# Allegro board PCB-DIAPAZON880.brd
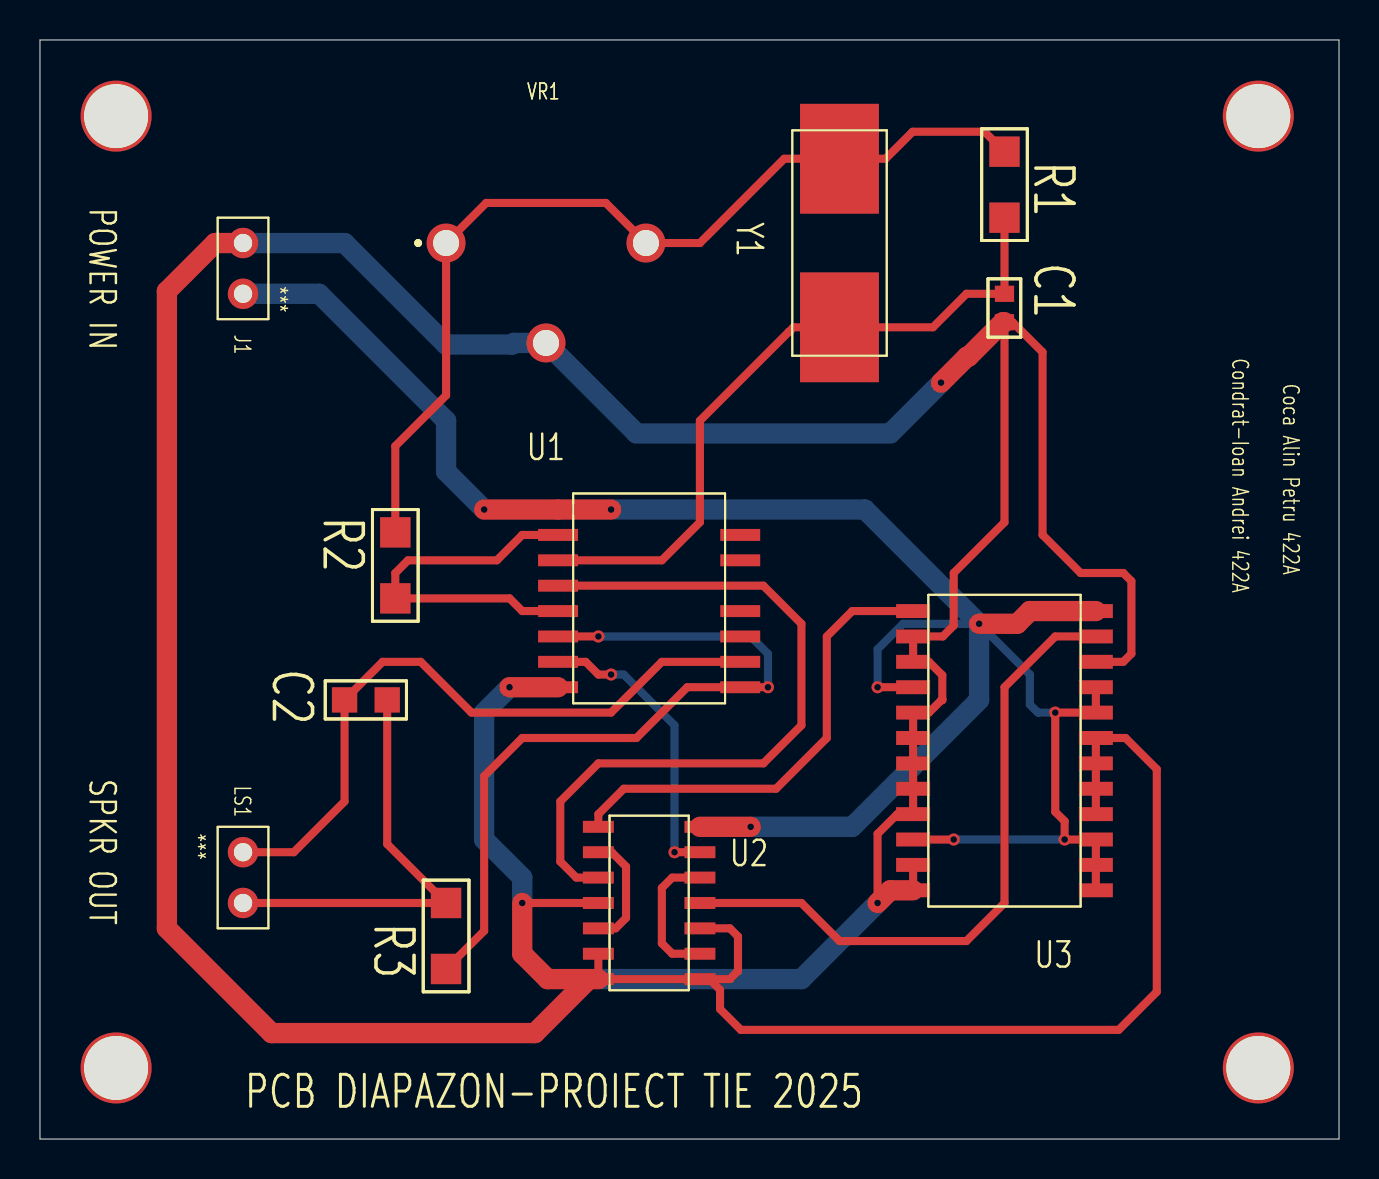
[diagram p0: board, top side]
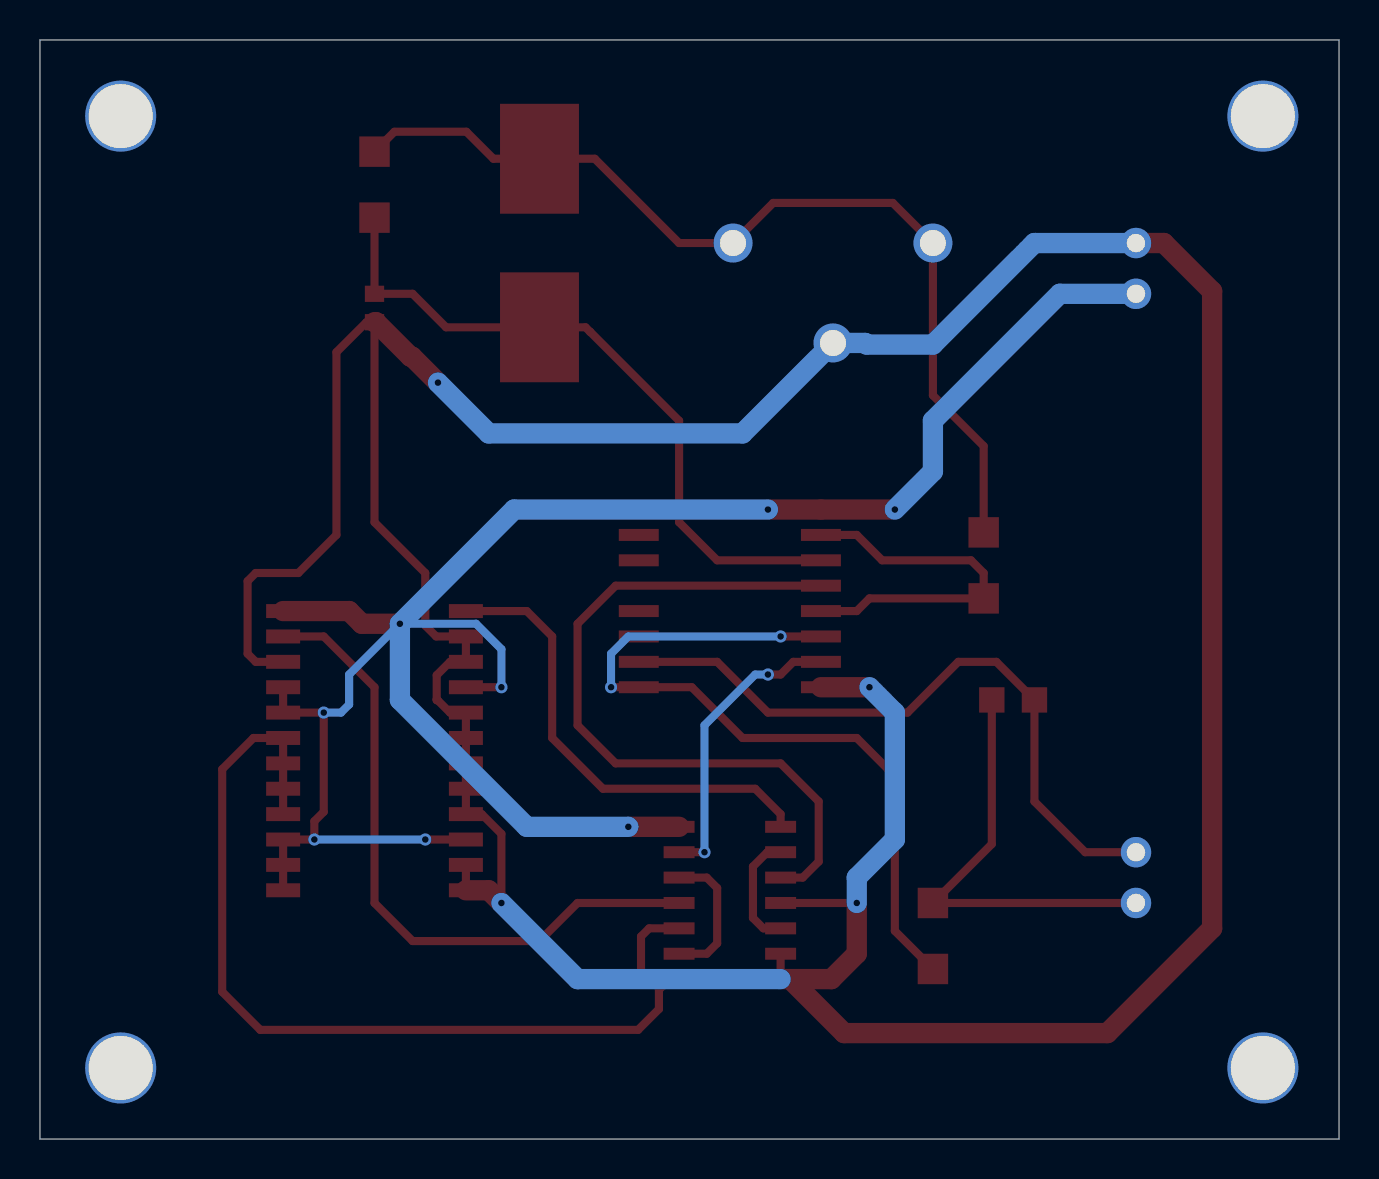
[diagram p1: board, bottom side, seen from below]

Outline 65 x 54.99 mm; copper layers: TOP, BOTTOM. Coordinates in mm from the lower left corner of the outline.
Outline path: 0,54.99 0,0 65,0 65,54.99 0,54.99

## Design rules (mm)
constraint set DEFAULT: min track width 0.127

## Placement (name value [footprint] x y rotation side)
C1  68p  [SMC0603]  48.26 42.29 270 top
C2  0.1  [SMC0805]  15.24 21.97 0 top
J1  CON2  [JUMPER2]  10.16 44.83 270 top
LS1  SPEAKER  [JUMPER2]  10.16 11.81 90 top
NOREF  -  [unnamed]  60.96 3.56 0 top
NOREF#2  -  [unnamed]  60.96 51.18 0 top
NOREF#3  -  [unnamed]  3.81 51.18 0 top
NOREF#4  -  [#2]  65 0 90 top
NOREF#5  -  [unnamed]  3.81 3.56 0 top
NOREF#6  -  [#2]  0 54.99 0 top
NOREF#7  -  [#2]  -35.56 -135.51 0 top
R1  1M  [SMC1206]  48.26 46.1 90 top
R2  1K  [SMC1206]  17.78 27.05 90 top
R3  1K  [SMC1206]  20.32 11.81 270 top
U1  4049  [CD4049]  30.48 27.05 0 top
U2  4013  [PTCD4013]  30.48 11.81 0 top
U3  4059  [CD74HC4059]  48.26 19.43 0 top
VR1  -  [BFC280831659]  20.32 44.83 0 top
Y1  3.2768M  [P2QUARTZ]  40 44.83 270 top

## Library data of the parts
C1 C2 = CAP
J1 = CON2: User Part Number: ***
LS1 = SPEAKER: User Part Number: ***
R1-R3 = RESISTOR
U1 = 4049_4
U2 = 4013_9
U3 = 4059_1
VR1 = BFC280831659
Y1 = CRYSTAL

## Footprints (pads in the part's own frame, mm; a bottom-side part is the same pattern mirrored in y, then rotated)
BFC280831659
  round 0 hole 3.2 unplated: (5,0)
  round 1.95 hole 1.3: 1(0,0) 2(5,-5) 3(10,0)
CD74HC4059
  rect 1.702x0.699 smd: 1(-4.572,6.985) 2(-4.572,5.715) 3(-4.572,4.445) 4(-4.572,3.175) 5(-4.572,1.905) 6(-4.572,0.635) 7(-4.572,-0.635) 8(-4.572,-1.905) 9(-4.572,-3.175) 10(-4.572,-4.445) 11(-4.572,-5.715) 12(-4.572,-6.985) 13(4.572,-6.985) 14(4.572,-5.715) 15(4.572,-4.445) 16(4.572,-3.175) 17(4.572,-1.905) 18(4.572,-0.635) 19(4.572,0.635) 20(4.572,1.905) 21(4.572,3.175) 22(4.572,4.445) 23(4.572,5.715) 24(4.572,6.985)
CD4049
  rect 1.999x0.599 smd: 1(-4.558,4.445) 2(-4.558,3.175) 3(-4.558,1.905) 4(-4.558,0.635) 5(-4.558,-0.635) 6(-4.558,-1.905) 7(-4.558,-3.175) 8(-4.558,-4.445) 9(4.558,-4.445) 10(4.558,-3.175) 11(4.558,-1.905) 12(4.558,-0.635) 14(4.558,1.905) 15(4.558,3.175)
JUMPER2
  round 1.524 hole 0.914: 1(0,0) 2(2.54,0)
P2QUARTZ
  rect 5.499x3.95 smd: 1(-4.216,0) 2(4.216,0)
PTCD4013
  rect 1.549x0.599 smd: 1(-2.54,3.81) 2(-2.54,2.54) 3(-2.54,1.27) 4(-2.54,0) 5(-2.54,-1.27) 6(-2.54,-2.54) 7(-2.54,-3.81) 8(2.54,-3.81) 9(2.54,-2.54) 10(2.54,-1.27) 11(2.54,0) 12(2.54,1.27) 13(2.54,2.54) 14(2.54,3.81)
SMC0603
  rect 0.813x0.965 smd: 1(0,0) 2(1.422,0)
SMC0805
  rect 1.27x1.27 smd: 1(0,0) 2(2.134,0)
SMC1206
  rect 1.524x1.524 smd: 1(0,0) 2(3.302,0)
unnamed
  round 3.556 hole 3.2 unplated: (0,0)

## Nets
+9V: J1.2 U1.1 U2.14 U3.4 U3.10 U3.13 U3.14 U3.15 U3.20 U3.21 U3.24(VCC)
GND: C1.2 J1.1 U1.8 U2.4 U2.6 U2.7 U2.8(S) U2.10 U3.2 U3.3 U3.5 U3.6 U3.7 U3.8 U3.9 U3.11 U3.12 U3.16 U3.17 U3.18 U3.19 U3.22 VR1.2(S)
N00452: C1.1 R1.1 U1.3 Y1.2
N00494: R1.2 R2.2 VR1.1 VR1.3 Y1.1
N00555: R2.1 U1.2 U1.5
N01503: U2.1 U3.1
N02785: R3.2 U1.6 U1.9
N02849: C2.1 LS1.2 U1.10
N02853: C2.2 LS1.1 R3.1
N19077: U2.2 U2.5
N19833: U1.7 U2.13
N19841: U2.9 U2.12
N19859: U2.11 U3.23
N21382: U1.4 U2.3

Pads without a net: U1 11 12 14 15

## Via types
v1: diameter 0.61, hole 0.33, TOP to BOTTOM, 16 vias

## Routing (per net, layer and track width the routed paths; a pad name or vN(x,y) marks a point on that pad's centre or on a via; arc(x,y) is an arc through that point)
+9V: length 109
  TOP w0.406: v1(41.91,22.61) U3.4 ; U3.10 v1(45.72,14.99) ; U3.21 U3.20 v1(50.8,21.34) 50.8,16.37 51.27,15.9 v1(51.27,14.99) U3.15 U3.13
  TOP w1.016: v1(28.57,31.5) U1.1 v1(22.23,31.5) ; U2.14 v1(35.56,15.62) ; v1(46.99,25.78) 48.89,25.78 49.53,26.42 52.83,26.42
  BOTTOM w0.406: v1(50.8,21.34) 49.94,21.34 49.53,21.74 49.53,23.24 v1(46.99,25.78) 43.18,25.78 41.91,24.51 v1(41.91,22.61) ; v1(45.72,14.99) v1(51.27,14.99)
  BOTTOM w1.016: v1(22.23,31.5) 20.32,33.4 20.32,35.94 13.97,42.29 J1.2 ; v1(28.57,31.5) 41.27,31.5 v1(46.99,25.78) 46.99,21.97 40.64,15.62 v1(35.56,15.62)
GND: length 263.2
  TOP w0.406: 45.1,21.96 45.15,21.96 45.15,22 ; 45.1,21.96 44.48,21.34 U3.5 U3.6 U3.8 U3.9 42.9,16.26 41.91,15.27 v1(41.91,11.81) ; 45.1,21.96 45.15,22 ; U2.6 U2.7 U2.8 33.49,8 ; U2.10 34.52,10.54 34.93,10.13 34.93,8.41 34.52,8 33.49,8 ; U3.16 U3.17 U3.19 54.32,20.07 55.88,18.5 55.88,7.37 53.98,5.46 35.07,5.46 34.03,6.5 34.03,7.47 33.49,8 ; 45.15,22 45.15,23.21 44.48,23.88 U3.3 U3.2 45.17,25.15 45.72,25.69 45.72,28.32 48.26,30.86 C1.2 48.67,40.87 50.17,39.37 50.17,30.23 52.07,28.32 54.2,28.32 54.61,27.91 54.61,24.28 54.2,23.88 U3.22 ; 43.69,13.72 U3.12 ; v1(24.13,11.81) U2.4
  TOP w1.016: U1.8 v1(23.5,22.61) ; J1.1 8.76,44.83 6.35,42.42 6.35,10.54 11.59,5.3 24.76,5.3 27.47,8 ; v1(24.13,11.81) 24.13,9.27 25.4,8 27.47,8 ; 27.47,8 U2.7 ; U3.12 42.55,12.45 v1(41.91,11.81) ; C1.2 48.18,40.87 46.46,39.15 46.38,39.15 v1(45.08,37.85)
  BOTTOM w1.016: U2.7 38.1,8 v1(41.91,11.81) ; J1.1 15.24,44.83 20.32,39.75 23.63,39.75 23.71,39.83 VR1.2 29.84,35.31 42.55,35.31 v1(45.08,37.85) ; v1(23.5,22.61) 22.23,21.34 22.23,14.99 24.13,13.08 v1(24.13,11.81)
N00452: length 34.6
  TOP w0.406: R1.1 C1.1 46.36,42.29 44.68,40.61 Y1.2 37.7,40.61 37.47,40.39 37.46,40.39 33.02,35.94 33.02,30.86 31.12,28.96 U1.3
N00494: length 47.9
  TOP w0.406: R2.2 17.78,34.67 20.32,37.21 VR1.1 22.33,46.84 28.31,46.84 VR1.3 33.02,44.83 37.24,49.05 Y1.1 42.31,49.05 43.66,50.4 47.26,50.4 R1.2
N00555: length 18.6
  TOP w0.406: 25.92,26.42 24.13,26.42 23.5,27.05 R2.1 17.78,28.32 18.42,28.96 22.86,28.96 24.13,30.23 U1.2
N01503: length 23.6
  TOP w0.406: U2.1 27.94,16.26 29.21,17.53 36.83,17.53 39.37,20.07 39.37,25.15 40.64,26.42 43.69,26.42
N02785: length 39
  TOP w0.406: v1(27.94,25.15) U1.6 ; R3.2 22.23,10.41 22.23,18.16 24.13,20.07 29.84,20.07 32.38,22.61 U1.9 v1(36.42,22.61)
  BOTTOM w0.406: v1(36.42,22.61) 36.42,24.28 35.56,25.15 v1(27.94,25.15)
N02849: length 33.9
  TOP w0.406: LS1.2 12.7,14.35 15.24,16.89 C2.1 17.14,23.88 19.05,23.88 21.59,21.34 28.57,21.34 31.12,23.88 U1.10
N02853: length 21.5
  TOP w0.406: C2.2 17.37,14.76 R3.1 LS1.1
N19077: length 5.9
  TOP w0.406: U2.2 28.61,14.35 29.32,13.63 29.32,11.06 28.8,10.54 U2.5
N19833: length 14.8
  TOP w0.406: U1.7 27.31,23.88 27.94,23.24 v1(28.57,23.24) ; U2.13 v1(31.75,14.35)
  BOTTOM w0.406: v1(31.75,14.35) 31.75,20.7 29.21,23.24 v1(28.57,23.24)
N19841: length 7
  TOP w0.406: U2.9 31.64,9.27 31.12,9.79 31.12,12.56 31.64,13.08 U2.12
N19859: length 33.2
  TOP w0.406: U2.11 38.1,11.81 40,9.91 46.36,9.91 48.26,11.81 48.26,22.61 50.8,25.15 U3.23
N21382: length 36.9
  TOP w0.406: U2.3 26.84,13.08 26.03,13.88 26.03,16.89 27.94,18.8 36.19,18.8 38.1,20.7 38.1,25.78 36.19,27.69 U1.4

## Text on the board
Ref Des/Silkscreen Top: Condrat-Ioan Andrei 422A | Coca Alin Petru 422A | POWER IN | SPKR OUT | PCB DIAPAZON-PROIECT TIE 2025
XSECTION_CHART: *  SURFACE | L1 TOP CONDUCTOR | *  DIELECTRIC | L2 BOTTOM CONDUCTOR | DESIGN CROSS SECTION CHART | ___________________________ | TOTAL THICKNESS 10.4 MIL | 1-2
DIMENSION: FIGURE | FINISHED_SIZE | 13.0 | 36.0 | 51.18 | 125.98 | 126.0 | DRILL CHART: TOP to BOTTOM | ALL UNITS ARE IN MILS | TOOL_SIZE | - | PLATED | NON-PLATED | QTY | 16 | 4 | 3 | 1 | 28 | TOTAL HOLES:
